# EAGLE board disciples_v1 (EAGLE 9.5.0)
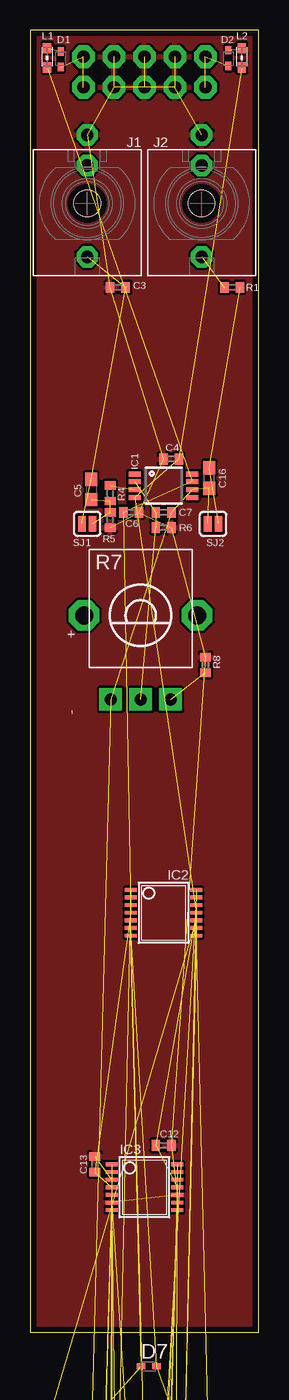
[diagram p0: board, top side]
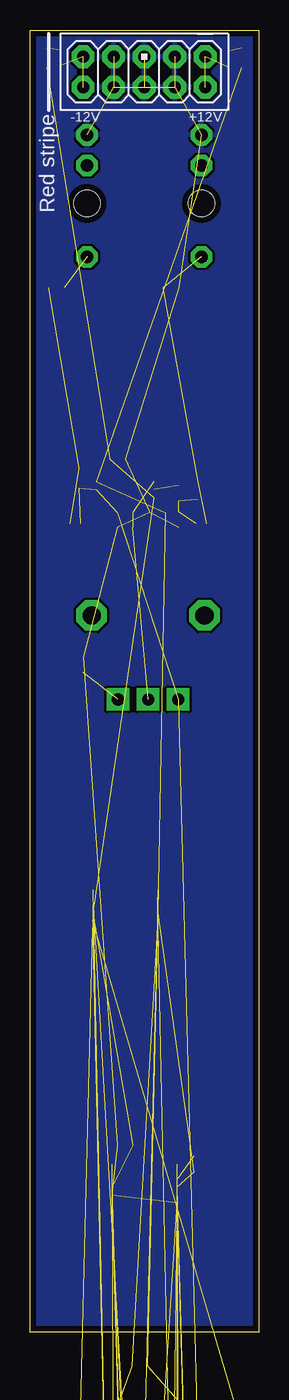
[diagram p1: board, bottom side, seen from below]

Size 19.03 x 108.43 mm. Coordinates in mm from the lower left corner, seen from the top.
Outline: 0,0 19.03,0 19.03,108.43 0,108.43 0,0
Copper layers (1*16): Top 0.035mm / dielectric 1.5mm / Bottom 0.035mm
Design rules "PCBCart-Standard *": minimum track width 8mil, minimum drill 0.4mm, track to track 8mil, track to pad 8mil, pad to pad 8mil, via to via 8mil, smd to smd 8mil, copper to edge 20mil, drill to drill 8mil, minimum pad ring 8mil, minimum via ring 10mil, stop-mask expansion 3mil, vias tented up to drill 25mil, thermal gap 8mil

## Footprints (pad centres in the part's own frame; a part is rotated, then mirrored left to right if it is on the bottom)
C1206 = smd 1.6 x 1.8: 1 -1.4,0; 2 1.4,0
C0402 = smd 0.7 x 0.9: 1 -0.65,0; 2 0.65,0
C0603 = smd 1.1 x 1: 1 -0.85,0; 2 0.85,0
PANASONIC_C = smd 2.6 x 1.4: + 2.05,0; - -2.05,0
SOD523 = smd 0.7 x 0.5: A 0.7,0; C -0.6,0
SOD323-W = smd 1.5 x 1.2: A 1.45,0; C -1.45,0
MSOP8 = smd 0.41 x 1.02: 1 -0.975,-2.4; 2 -0.325,-2.4; 3 0.325,-2.4; 4 0.975,-2.4; 5 0.975,2.4; 6 0.325,2.4; 7 -0.325,2.4; 8 -0.975,2.4
TSSOP14 = smd 0.305 x 0.991: 1 -1.905,-2.718; 2 -1.27,-2.718; 3 -0.635,-2.718; 4 0,-2.718; 5 0.635,-2.718; 6 1.27,-2.718; 7 1.905,-2.718; 8 1.905,2.718; 9 1.27,2.718; 10 0.635,2.718; 11 0,2.718; 12 -0.635,2.718; 13 -1.27,2.718; 14 -1.905,2.718
SO08 = smd 0.6 x 2.2: 1 -1.905,-2.6; 2 -0.635,-2.6; 3 0.635,-2.6; 4 1.905,-2.6; 5 1.905,2.6; 6 0.635,2.6; 7 -0.635,2.6; 8 -1.905,2.6
DBZ_R-PDSO-G3 = smd 0.7 x 1: 1 -0.95,-1.1; 2 0.95,-1.1; 3 0,1.1
WQP_PJ_301M6 = drill 1.016 pad 1.778 octagon: P1 0,-5.715; P2 0,-3.175; P3 0,4.445 | hole 2.2: 0,0
AVR_ICSP = drill 1.016 pad 1.88 octagon: 1 -1.27,5.08; 2 1.27,5.08; 3 -1.27,2.54; 4 1.27,2.54; 5 -1.27,0; 6 1.27,0; 7 -1.27,-2.54; 8 1.27,-2.54; 9 -1.27,-5.08; 10 1.27,-5.08
0603 = smd 0.85 x 0.7: 1 -0.9,0; 2 0.7,0
LED3MM = drill 0.813 octagon: A -1.27,0; K 1.27,0
SOT23-BEC = smd 1 x 1.4: B -0.95,-1.1; C 0,1.1; E 0.95,-1.1
R0402 = smd 0.7 x 0.9: 1 -0.65,0; 2 0.65,0
R0603 = smd 1 x 1.1: 1 -0.85,0; 2 0.85,0
ALPS_POT_VERTICAL_PS = drill 1 pad 1.88 square: P$1 -2.5,7; P$2 0,7; P$3 2.5,7 | drill 1.5 pad 2.54 octagon: P$4 -4.7,0; P$5 4.7,0
SJ_2S = smd 0.635 x 1.27: 1 -0.45,0; 2 0.45,0

## Placement (x,y rotation side)
C1  22u  [C1206]  1.91,-280.35 0 top  (outside the outline)
C2  22u  [C1206]  1.91,-286.7 0 top  (outside the outline)
C3  68p  [C0402]  7.3,87 180 top
C4  100n  [C0402]  11.75,72.71 0 top
C5  4.7u  [C0603]  5.08,70.17 270 top
C6  100n  [C0402]  8.41,68.26 0 top
C7  22p  [C0402]  11.11,68.26 0 top
C8  1u  [C0402]  0.95,-147.96 0 top  (outside the outline)
C9  100n  [C0402]  0.64,-297.5 0 top  (outside the outline)
C10  100u  [C0402]  0.64,-532.13 0 top  (outside the outline)
C11  10u  [C0402]  5.71,-228.28 0 top  (outside the outline)
C12  100n  [C0402]  11.11,15.56 180 top
C13  100n  [C0402]  5.4,13.97 90 top
C14  100n  [C0603]  0.95,-199.39 0 top  (outside the outline)
C15  4.7u  [C0603]  11.75,-21.59 0 top  (outside the outline)
C16  4.7u  [C0603]  14.92,71.12 90 top
C17  4.7u  [C0603]  0.64,-292.42 0 top  (outside the outline)
C18  100n  [C0402]  0.64,-302.58 0 top  (outside the outline)
C19  100n  [C0402]  0.64,-406.72 0 top  (outside the outline)
C20  100n  [C0402]  0.64,-411.8 0 top  (outside the outline)
C21  [C0402]  0.64,-421.96 0 top  (outside the outline)
C22  100n  [C0603]  0.64,-488 0 top  (outside the outline)
C23  100n  [C0402]  0.64,-506.73 0 top  (outside the outline)
C24  100n  [C0402]  0.64,-511.81 0 top  (outside the outline)
C25  100n  [C0402]  0.64,-577.53 0 top  (outside the outline)
C26  100n  [C0402]  0.64,-582.61 0 top  (outside the outline)
C55  100n  [C0603]  6.67,-182.25 0 top  (outside the outline)
C56  100n  [C0603]  12.06,-182.25 0 top  (outside the outline)
C57  100n  [C0603]  17.46,-182.25 0 top  (outside the outline)
C58  22u  [PANASONIC_C]  11.75,-159.38 0 top  (outside the outline)
D1  PMEG2010AEB  [SOD523]  2.54,106.05 270 top
D2  PMEG2010AEB  [SOD523]  16.51,106.05 90 top
D3  1N4148  [SOD523]  0.32,-516.89 0 top  (outside the outline)
D4  1N4148  [SOD523]  9.53,-134.3 0 top  (outside the outline)
D5  1N4148  [SOD523]  8.89,-213.04 0 top  (outside the outline)
D6  1N4148  [SOD523]  0.64,-218.12 0 top  (outside the outline)
D7  1N4148  [SOD523]  9.84,-2.86 0 top
D8  1N4148  [SOD523]  0.95,-11.43 0 top  (outside the outline)
D9  1N4148  [SOD523]  0.32,-521.97 0 top  (outside the outline)
D13  1N4148  [SOD323-W]  1.59,-166.69 0 top  (outside the outline)
D14  1N4148  [SOD323-W]  9.84,-166.69 0 top  (outside the outline)
IC1  OPA1641  [MSOP8]  11.11,70.48 270 top
IC2  LM324PW  [TSSOP14]  11.11,34.92 270 top
IC3  LM324PW  [TSSOP14]  9.53,12.06 270 top
IC4  TL072D  [SO08]  3.81,-160.02 0 top  (outside the outline)
IC5  LM324PW  [TSSOP14]  3.49,-400.69 0 top  (outside the outline)
IC6  LM4040B10  [DBZ_R-PDSO-G3]  1.91,-193.04 0 top  (outside the outline)
IC7  LM4040B50  [DBZ_R-PDSO-G3]  1.59,-481.65 0 top  (outside the outline)
IC8  LM324PW  [TSSOP14]  3.49,-495.62 0 top  (outside the outline)
IC9  LM324PW  [TSSOP14]  3.49,-539.75 0 top  (outside the outline)
J1  PJ301_THONKICONN6  [WQP_PJ_301M6]  4.76,93.98 180 top
J2  PJ301_THONKICONN6  [WQP_PJ_301M6]  14.29,93.98 180 top
J3  PJ301_THONKICONN6  [WQP_PJ_301M6]  3.81,-80.64 0 top  (outside the outline)
J4  PJ301_THONKICONN6  [WQP_PJ_301M6]  3.81,-351.79 0 top  (outside the outline)
J5  PJ301_THONKICONN6  [WQP_PJ_301M6]  4.45,-32.38 0 top  (outside the outline)
J6  PJ301_THONKICONN6  [WQP_PJ_301M6]  3.81,-54.61 0 top  (outside the outline)
J7  PJ301_THONKICONN6  [WQP_PJ_301M6]  3.81,-67.63 0 top  (outside the outline)
J8  PJ301_THONKICONN6  [WQP_PJ_301M6]  3.81,-338.77 0 top  (outside the outline)
J9  PJ301_THONKICONN6  [WQP_PJ_301M6]  3.81,-111.76 0 top  (outside the outline)
J10  PJ301_THONKICONN6  [WQP_PJ_301M6]  3.81,-124.78 0 top  (outside the outline)
J11  PJ301_THONKICONN6  [WQP_PJ_301M6]  3.81,-369.89 0 top  (outside the outline)
J12  PJ301_THONKICONN6  [WQP_PJ_301M6]  3.81,-562.93 0 top  (outside the outline)
JP4  M05X2PTH  [AVR_ICSP]  9.53,104.93 270 bottom
L1  [0603]  1.43,106.2 90 top
L2  [0603]  17.62,106.2 90 top
LED1  WP710A10SEC/J3  [LED3MM]  1.59,-152.72 0 top  (outside the outline)
LED2  AOL-3MWY4  [LED3MM]  1.27,-447.04 0 top  (outside the outline)
LED3  WP710A10SEC/J4  [LED3MM]  1.27,-466.09 0 top  (outside the outline)
LED4  WP710A10SEC/J3  [LED3MM]  1.59,-187.01 0 top  (outside the outline)
LED5  WP710A10GD  [LED3MM]  1.27,-475.62 0 top  (outside the outline)
Q1  MMBT3904  [SOT23-BEC]  17.78,-158.75 0 top  (outside the outline)
R1  510  [R0402]  16.83,87 180 top
R2  510  [R0402]  0.95,-90.17 0 top  (outside the outline)
R3  3.3k  [R0603]  6.35,-199.39 0 top  (outside the outline)
R4  10k  [R0402]  6.67,69.85 270 top
R5  1.0M  [R0402]  6.67,67.63 90 top
R6  10k  [R0402]  11.11,66.99 0 top
R7  50k  [ALPS_POT_VERTICAL_PS]  9.21,59.69 180 top
R8  510  [R0402]  14.61,55.56 90 top
R9  20k  [R0402]  0.64,-442.28 0 top  (outside the outline)
R10  10k  [R0402]  0.64,-461.33 0 top  (outside the outline)
R11  10k  [R0402]  11.11,-142.88 0 top  (outside the outline)
R12  50k  [ALPS_POT_VERTICAL_PS]  5.4,-389.89 0 top  (outside the outline)
R13  1k  [R0402]  0.64,-416.88 0 top  (outside the outline)
R14  1k  [R0402]  0.64,-427.04 0 top  (outside the outline)
R15  1k  [R0402]  0.64,-432.12 0 top  (outside the outline)
R16  1k  [R0402]  0.64,-437.2 0 top  (outside the outline)
R17  10k  [R0402]  0.64,-470.85 0 top  (outside the outline)
R18  50k  [ALPS_POT_VERTICAL_PS]  5.4,-313.06 0 top  (outside the outline)
R19  50k  [ALPS_POT_VERTICAL_PS]  5.4,-327.02 0 top  (outside the outline)
R20  3.3k  [R0603]  6.03,-488 0 top  (outside the outline)
R21  1k  [R0402]  0.64,-501.65 0 top  (outside the outline)
R22  1k  [R0402]  0.64,-527.05 0 top  (outside the outline)
R23  510  [R0402]  0.64,-361.31 0 top  (outside the outline)
R24  50k  [ALPS_POT_VERTICAL_PS]  5.4,-551.18 0 top  (outside the outline)
R25  100k  [R0402]  11.75,-223.2 0 top  (outside the outline)
R26  47k  [R0402]  0.95,-228.28 0 top  (outside the outline)
R27  510  [R0402]  0.64,-572.45 0 top  (outside the outline)
R28  47k  [R0402]  0.95,-223.2 0 top  (outside the outline)
R29  100k  [R0402]  6.35,-223.2 0 top  (outside the outline)
R30  49.9  [R0402]  8.89,-11.43 0 top  (outside the outline)
R31  1k  [R0402]  14.29,-11.43 0 top  (outside the outline)
R32  1k  [R0402]  1.27,-16.51 0 top  (outside the outline)
R33  510  [R0402]  10.48,-108.27 0 top  (outside the outline)
R34  1k  [R0402]  12.06,-16.51 0 top  (outside the outline)
R35  470  [R0402]  0.64,-587.69 0 top  (outside the outline)
R36  510  [R0402]  6.67,-41.91 0 top  (outside the outline)
R112  1.0k  [R0603]  6.67,-172.09 0 top  (outside the outline)
R113  12k  [R0603]  12.38,-172.09 0 top  (outside the outline)
R114  100k  [R0603]  18.1,-172.09 0 top  (outside the outline)
R115  100k  [R0603]  0.95,-177.16 0 top  (outside the outline)
R116  22k  [R0603]  6.67,-177.16 0 top  (outside the outline)
R117  100k  [R0603]  12.38,-177.16 0 top  (outside the outline)
R118  100k  [R0603]  18.1,-177.16 0 top  (outside the outline)
R119  220k  [R0603]  0.95,-182.25 0 top  (outside the outline)
R120  100k  [R0603]  17.14,-166.37 0 top  (outside the outline)
R121  100k  [R0603]  0.95,-172.09 0 top  (outside the outline)
SJ1  SOLDERJUMPERNC  [SJ_2S]  4.76,67.31 0 top
SJ2  SOLDERJUMPERNC  [SJ_2S]  15.24,67.31 0 top

## Library data of the parts
C1-C26 C55-C58 R1-R6 R8-R11 R13-R17 R20-R23 R25-R36 R112-R121 = rcl
D1-D9 D13 D14 = diode
IC1-IC3 IC5 IC8 IC9 = og-ics
IC4 = og-linear
IC6 IC7 = texas
J1-J12 = og-pj301
JP4 = og-header
L1 L2 = wuerth-elektronik
LED1-LED5 = led
Q1 = transistor
R7 R12 R18 R19 R24 = og-pots
SJ1 SJ2 = SparkFun

## Nets
AMP_OUT: C7.2 C16.1 C57.2 IC1.6 J6.P2 R7.P$3 SJ2.1
AREF_+5: C22.1 IC7.1 IC8.5 R20.2 R24.P$3
AREF_+10: C14.1 IC2.13 IC6.1 R3.2 R118.2 R121.2
COMP: D3.A D9.C IC8.6 IC8.9 IC8.12 R21.2 R33.1
COMP_-12_+12: IC8.1 R21.1
FULL_WAVE_RECT: IC2.8 IC2.12 J7.P2 R34.2 R36.1
FWR_CLIP: D4.A IC2.14
GND: C1.2 C2.1 C3.2 C4.1 C6.2 C8.2 C9.2 C12.1 C13.2 C14.2 C18.1 C19.2 C20.1 C21.2 C22.2 C23.2 C24.1 C25.2 C26.1 C55.2 C56.2 C58.- IC3.3 IC3.6 IC3.10 IC4.4 IC6.2 IC7.2 IC8.10 J1.P1 J2.P1 J3.P1 J4.P1 J5.P1 J6.P1 J7.P1 J8.P1 J9.P1 J10.P1 J11.P1 J12.P1 JP4.3 JP4.4 JP4.5 JP4.6 JP4.7 JP4.8 LED1.K Q1.E R5.1 R6.2 R8.2 R9.2 R10.1 R17.2 R24.P$1 R30.1 R32.1 R116.1 R117.1 R120.1
LOWPASS: IC5.8 IC5.9 IC5.12 J11.P2 R23.1
N$1: J7.P3 R13.1
N$2: IC1.3 R4.1
N$3: J2.P3 R1.2
N$4: C3.1 C5.1 J1.P3 SJ1.1
N$5: C15.2 D7.C D8.A IC2.7
N$6: D1.A JP4.1 JP4.2
N$7: J5.P3 R36.2
N$8: IC3.13 IC3.14 R25.1
N$9: C7.1 IC1.2 R6.1 R7.P$2
N$10: C5.2 R4.2 R5.2 SJ1.2
N$11: C15.1 D7.A IC2.6 R31.1
N$12: D8.C IC2.10 R32.2
N$13: R7.P$1 R8.1
N$14: IC2.9 R31.2 R34.1
N$15: C16.2 R1.1 SJ2.2
N$16: J3.P3 R2.2
N$17: IC5.2 LED3.K R10.2
N$18: IC3.2 R25.2 R29.1
N$19: IC3.1 R26.1 R29.2
N$20: D2.C JP4.9 JP4.10
N$21: IC3.5 R26.2 R28.1
N$22: D1.C L1.2
N$23: D5.A D6.C IC3.7
N$24: D5.C R19.P$3
N$25: D6.A R18.P$3
N$26: C11.1 IC3.9 R18.P$2 R19.P$2
N$27: C17.1 R22.2
N$28: C8.1 D4.C R11.2
N$29: IC3.12 R13.2
N$30: IC5.1 LED3.A
N$31: LED1.A R11.1
N$32: C17.2 IC2.3
N$33: IC2.1 IC2.2 IC2.5 R30.2
N$34: J9.P3 R33.2
N$35: C21.1 IC5.10 R12.P$3
N$36: IC5.5 R14.2
N$37: IC8.13 LED5.K R17.1
N$38: IC8.14 LED5.A
N$39: J8.P3 R14.1
N$40: J4.P3 R23.2
N$41: J11.P3 R15.1
N$42: J10.P3 R16.1
N$43: IC5.6 IC5.7 R12.P$2
N$44: D2.A L2.2
N$45: IC8.2 R16.2
N$46: IC5.14 LED2.A
N$47: IC8.3 R15.2
N$48: IC5.13 LED2.K R9.1
N$49: J6.P3 R22.1
N$50: IC9.3 R24.P$2
N$51: D3.C IC8.7
N$52: D9.A IC8.8
N$53: J12.P3 R27.2
N$55: IC3.8 R28.2 R35.1
N$60: LED4.K Q1.C
N$94: C57.1 R115.1
N$96: IC4.3 IC4.6 R115.2 R117.2 R118.1
N$97: IC4.2 R119.2 R121.1
N$98: C55.1 R113.2 R114.1
N$99: IC4.5 R119.1 R120.2
N$100: D13.A IC4.1
N$101: D14.A IC4.7
N$102: D13.C D14.C R113.1
N$103: LED4.A R112.1
N$104: Q1.B R114.2 R116.2
SLEW: C10.2 C11.2 IC5.3 J8.P2 R2.1 R35.2
THRESH: IC9.1 IC9.2 J10.P2 R27.1
VCC: C1.1 C6.1 C9.1 C13.1 C19.1 C23.1 C25.1 C56.1 C58.+ IC1.7 IC2.4 IC3.4 IC4.8 IC5.4 IC8.4 IC9.4 L1.1 R3.1 R20.1 R112.2
VEE: C2.2 C4.2 C12.2 C18.2 C20.2 C24.2 C26.2 IC1.4 IC2.11 IC3.11 IC5.11 IC8.11 IC9.11 L2.1

## Tracks (layer width: path | path; a pad name or v marks a point on that pad's centre or on a via)
AMP_OUT  (6 unrouted)
AREF_+5  (4 unrouted)
AREF_+10  (5 unrouted)
COMP  (6 unrouted)
COMP_-12_+12  (1 unrouted)
FULL_WAVE_RECT  (4 unrouted)
FWR_CLIP  (1 unrouted)
GND  (60 unrouted)
  pour Bottom: 0,108.43 0,0 19.05,0 19.05,108.43
  pour Top: 0,108.43 0,0 19.05,0 19.05,108.43
LOWPASS  (4 unrouted)
N$1  (1 unrouted)
N$2  (1 unrouted)
N$3  (1 unrouted)
N$4  (3 unrouted)
N$5  (3 unrouted)
N$6  (2 unrouted)
N$7  (1 unrouted)
N$8  (2 unrouted)
N$9  (3 unrouted)
N$10  (3 unrouted)
N$11  (3 unrouted)
N$12  (2 unrouted)
N$13  (1 unrouted)
N$14  (2 unrouted)
N$15  (2 unrouted)
N$16  (1 unrouted)
N$17  (2 unrouted)
N$18  (2 unrouted)
N$19  (2 unrouted)
N$20  (2 unrouted)
N$21  (2 unrouted)
N$22  (1 unrouted)
N$23  (2 unrouted)
N$24  (1 unrouted)
N$25  (1 unrouted)
N$26  (3 unrouted)
N$27  (1 unrouted)
N$28  (2 unrouted)
N$29  (1 unrouted)
N$30  (1 unrouted)
N$31  (1 unrouted)
N$32  (1 unrouted)
N$33  (3 unrouted)
N$34  (1 unrouted)
N$35  (2 unrouted)
N$36  (1 unrouted)
N$37  (2 unrouted)
N$38  (1 unrouted)
N$39  (1 unrouted)
N$40  (1 unrouted)
N$41  (1 unrouted)
N$42  (1 unrouted)
N$43  (2 unrouted)
N$44  (1 unrouted)
N$45  (1 unrouted)
N$46  (1 unrouted)
N$47  (1 unrouted)
N$48  (2 unrouted)
N$49  (1 unrouted)
N$50  (1 unrouted)
N$51  (1 unrouted)
N$52  (1 unrouted)
N$53  (1 unrouted)
N$55  (2 unrouted)
N$60  (1 unrouted)
N$94  (1 unrouted)
N$96  (4 unrouted)
N$97  (2 unrouted)
N$98  (2 unrouted)
N$99  (2 unrouted)
N$100  (1 unrouted)
N$101  (1 unrouted)
N$102  (2 unrouted)
N$103  (1 unrouted)
N$104  (2 unrouted)
SLEW  (5 unrouted)
THRESH  (3 unrouted)
VCC  (19 unrouted)
VEE  (13 unrouted)

## Text on the board
tPlace: + | -
bPlace: Red stripe
bNames: +12V | -12V